# Altium PCB changable resistor.pcbdoc
Units mm, origin at the board's own origin, x right, y up, seen from the top; angles counter-clockwise.
Board outline 32.26 x 30.2 mm, 2 copper layers (Top Layer, Bottom Layer); 1 components, 0 nets, 3 pads, 0 vias.
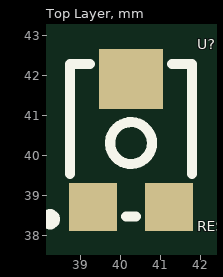
[diagram p0: Top Layer view]
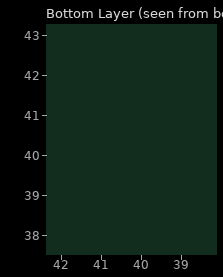
[diagram p1: Bottom Layer view, seen from below]

## Layer stack, top to bottom
Top Layer: signal copper (thickness not stored)
Dielectric: dielectric 0.32, FR-4, Dk 4.8
Bottom Layer: signal copper (thickness not stored)

## Board outline
57.658,25.4 25.4,25.4 25.4,55.604 57.658,55.604

## Components (designator, comment, footprint, x,y, rotation, side; value= is the part's Value field where it differs from the comment)
U? "RES-ADJ-SMD_TC33X-2-104E" RES-ADJ-SMD_TC33X-2-104E 40.005,40.375 r0 top

## Footprints (in the part's own frame and the unit in brackets; to place one, negate y for a bottom-side part, rotate by r counter-clockwise, add the part's x,y. Pads: shape width x height; smd on the part's side, far side on the other; paste and mask are expansions set on the pad)
RES-ADJ-SMD_TC33X-2-104E [mm]
  rect 1.2x1.2 smd paste+0 mask+0.051: 1(-0.696,-1.675) 3(1.204,-1.675)
  rect 1.6x1.5 smd paste+0 mask+0.051: 2(0.254,1.525)
  silkscreen extent -1.9,-2.11 1.78,1.9

## Nets (pads, with @x,y where several pads share a name; then routed paths per layer and width w, separated by ;. In a path a pad name is that pad's centre, name@x,y a point inside that pad or via, vN(x,y) a via of type N, cw(c..) or ccw(c..) an arc to the next point about the centre after c; other vN are vias at no path point)
pads on no net: U?.1 U?.2 U?.3